# EAGLE board Grand Jofo (EAGLE 9.7.0)

Size 82.4 x 107.82 mm. Coordinates in mm from the lower left corner, seen from the top.
Outline: 0,0 82.4,0 82.4,107.82 0,107.82 0,0
Copper layers (1*16): Top 0.035mm / dielectric 1.5mm / Bottom 0.035mm
Design rules "default": minimum track width 6mil, minimum drill 0.35mm, track to track 6mil, track to pad 6mil, pad to pad 6mil, via to via 6mil, smd to smd 6mil, copper to edge 40mil, drill to drill 6mil, minimum pad ring 10mil, minimum via ring 8mil, stop-mask expansion 4mil, vias tented up to drill 0mil, thermal gap 10mil

## Footprints (pad centres in the part's own frame; a part is rotated, then mirrored left to right if it is on the bottom)
LEDRD254W60D565H860B = drill 0.981 pad 1.581: 1 -1.27,0; 2 1.27,0
RESAD1016W63L850D250B = drill 0.83 pad 1.43: 1 -5.08,0; 2 5.08,0
ARDUINO-UNO-R3-SHIELD = drill 1.016 pad 1.88: 3.3V 24.13,-2.54; 5V 24.13,0; A0 24.13,12.7; A1 24.13,15.24; A2 24.13,17.78; A3 24.13,20.32; A4 24.13,22.86; A5 24.13,25.4; AREF -24.13,-13.97; D2 -24.13,20.32; D3 -24.13,17.78; D4 -24.13,15.24; D5 -24.13,12.7; D6 -24.13,10.16; D7 -24.13,7.62; D8 -24.13,3.81; D9 -24.13,1.27; D10 -24.13,-1.27; D11 -24.13,-3.81; D12 -24.13,-6.35; D13 -24.13,-8.89; GND@0 24.13,2.54; GND@1 24.13,5.08; GND@2 -24.13,-11.43; IOREF 24.13,-7.62; NC 24.13,-10.16; RES 24.13,-5.08; RX -24.13,25.4; SCL -24.13,-19.05; SDA -24.13,-16.51; TX -24.13,22.86; VIN 24.13,7.62

## Placement (x,y rotation side)
D1  RED  [LEDRD254W60D565H860B]  45.47,99.91 180 top
D3  RED  [LEDRD254W60D565H860B]  32.77,99.91 180 top
D12  RED  [LEDRD254W60D565H860B]  50.55,99.91 180 top
D13  RED  [LEDRD254W60D565H860B]  58.17,99.91 180 top
D14  RED  [LEDRD254W60D565H860B]  37.85,99.91 180 top
D15  RED  [LEDRD254W60D565H860B]  63.25,99.91 180 top
R3  150  [RESAD1016W63L850D250B]  34.04,92.29 90 top
R4  150  [RESAD1016W63L850D250B]  59.44,92.29 90 top
R5  150  [RESAD1016W63L850D250B]  39.12,92.29 90 top
R6  150  [RESAD1016W63L850D250B]  64.52,92.29 90 top
R7  150  [RESAD1016W63L850D250B]  46.74,92.29 90 top
R8  150  [RESAD1016W63L850D250B]  51.82,92.29 90 top
U1  ARDUINO-UNO-R3-SHIELD  [ARDUINO-UNO-R3-SHIELD]  47.88,29.84 270 top

## Library data of the parts
D1 D3 D12-D15 = Tinkercad; CATEGORY: Opto-Electronic; SUB-CATEGORY: LED; VALUE: LED_RED
R3-R8 U1 = Tinkercad

## Nets
D1_A: D1.1 R7.2
D3_A: D3.1 R3.2
D12_A: D12.1 R8.2
D13_A: D13.1 R4.2
D14_A: D14.1 R5.2
D15_A: D15.1 R6.2
U1_D3: R6.1 U1.D3
U1_D5: R4.1 U1.D5
U1_D6: R8.1 U1.D6
U1_D9: R7.1 U1.D9
U1_D10: R5.1 U1.D10
U1_D11: R3.1 U1.D11
U1_GND: D1.2 D3.2 D12.2 D13.2 D14.2 D15.2 U1.GND@0 U1.GND@1 U1.GND@2

## Tracks (layer width: path | path; a pad name or v marks a point on that pad's centre or on a via)
D1_A  (1 unrouted)
D3_A  (1 unrouted)
D12_A  (1 unrouted)
D13_A  (1 unrouted)
D14_A  (1 unrouted)
D15_A  (1 unrouted)
U1_D3  (1 unrouted)
U1_D5  (1 unrouted)
U1_D6  (1 unrouted)
U1_D9  (1 unrouted)
U1_D10  (1 unrouted)
U1_D11  (1 unrouted)
U1_GND  (8 unrouted)